# Altium PCB V1.PcbDoc
Units mil, origin at the board's own origin, x right, y up, seen from the top; angles counter-clockwise.
Board outline 2420 x 2113 mil, 2 copper layers (Top Layer, Bottom Layer); 39 components, 0 nets, 143 pads, 0 vias.
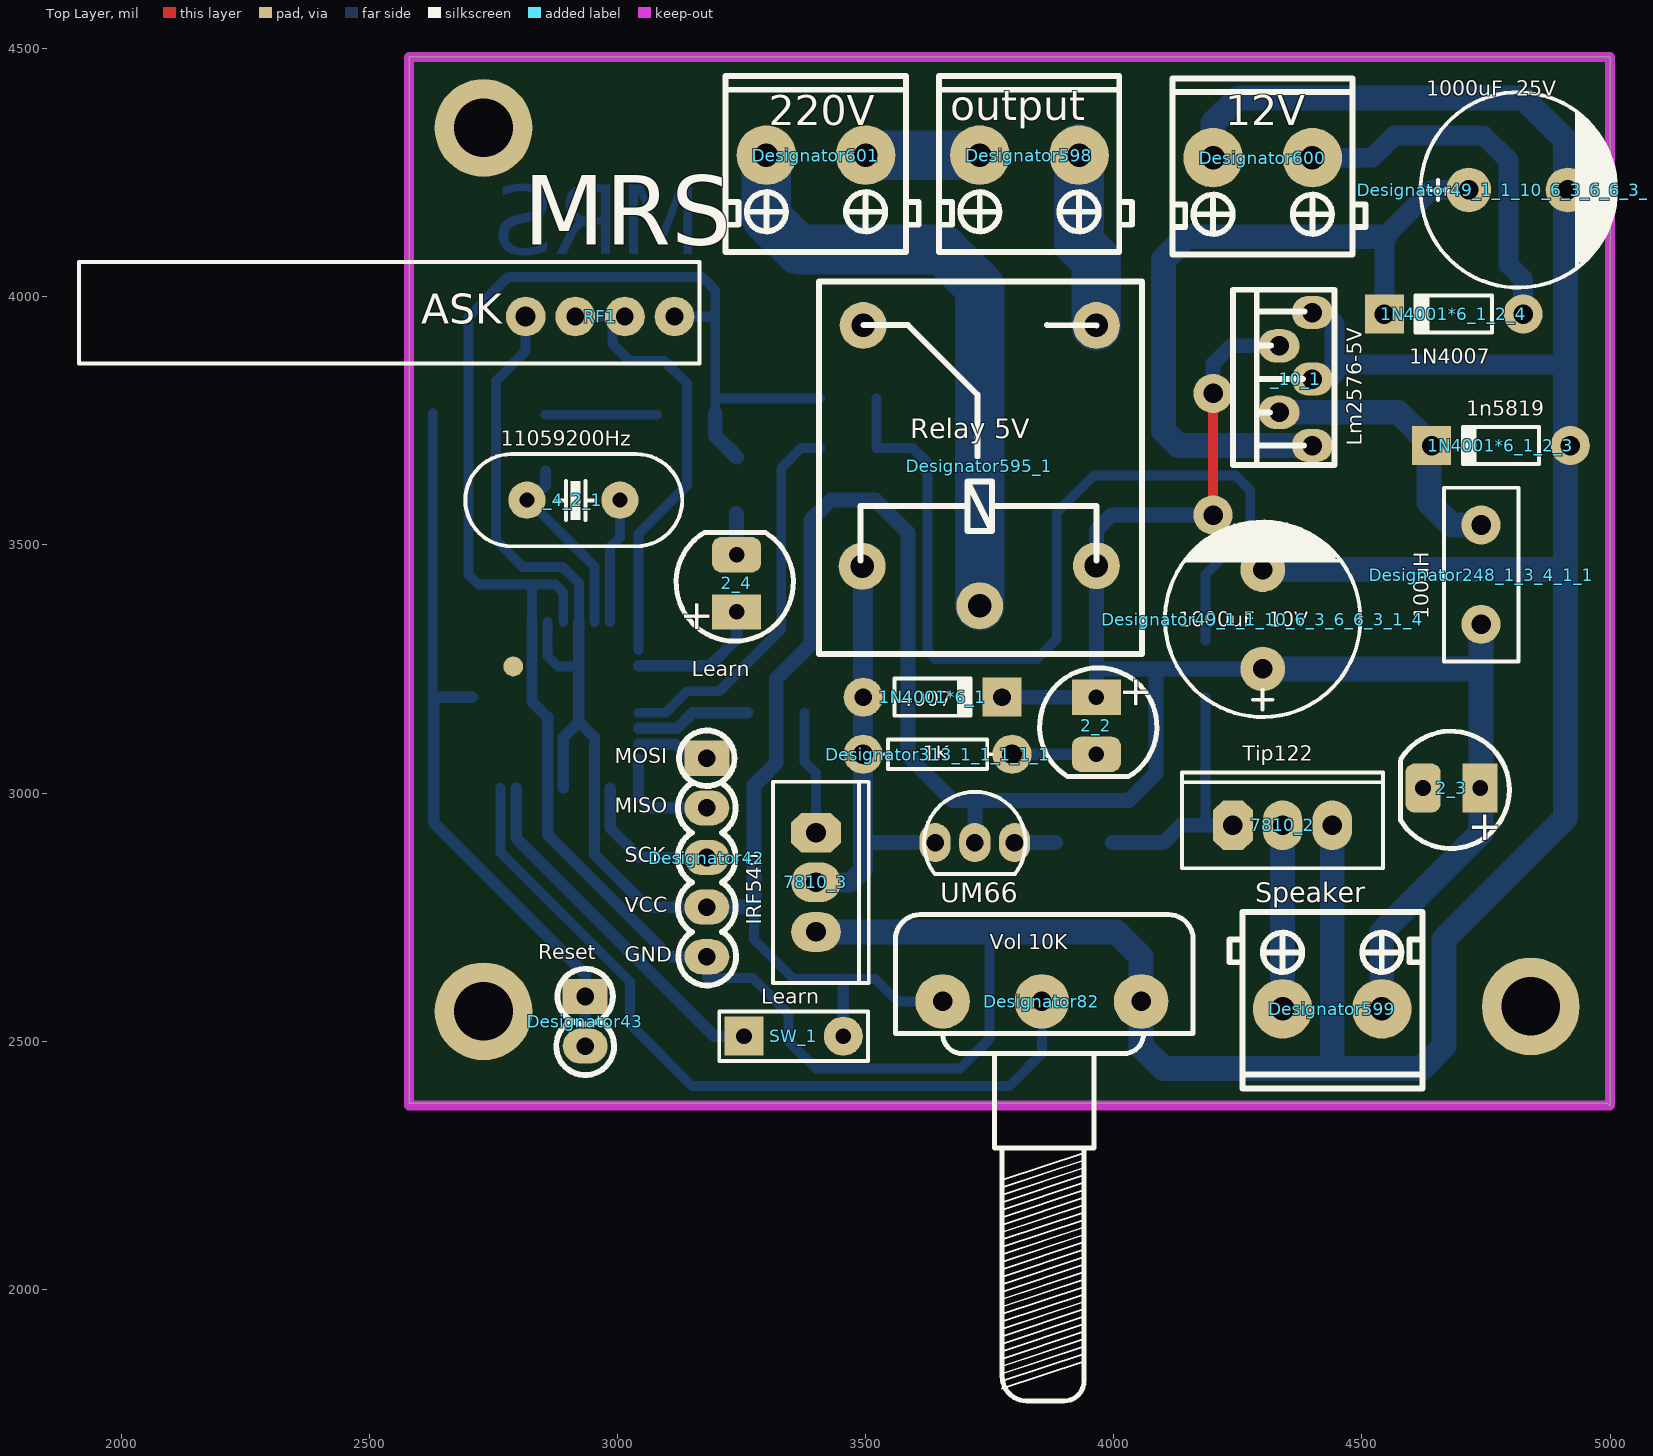
[diagram p0: Top Layer view]
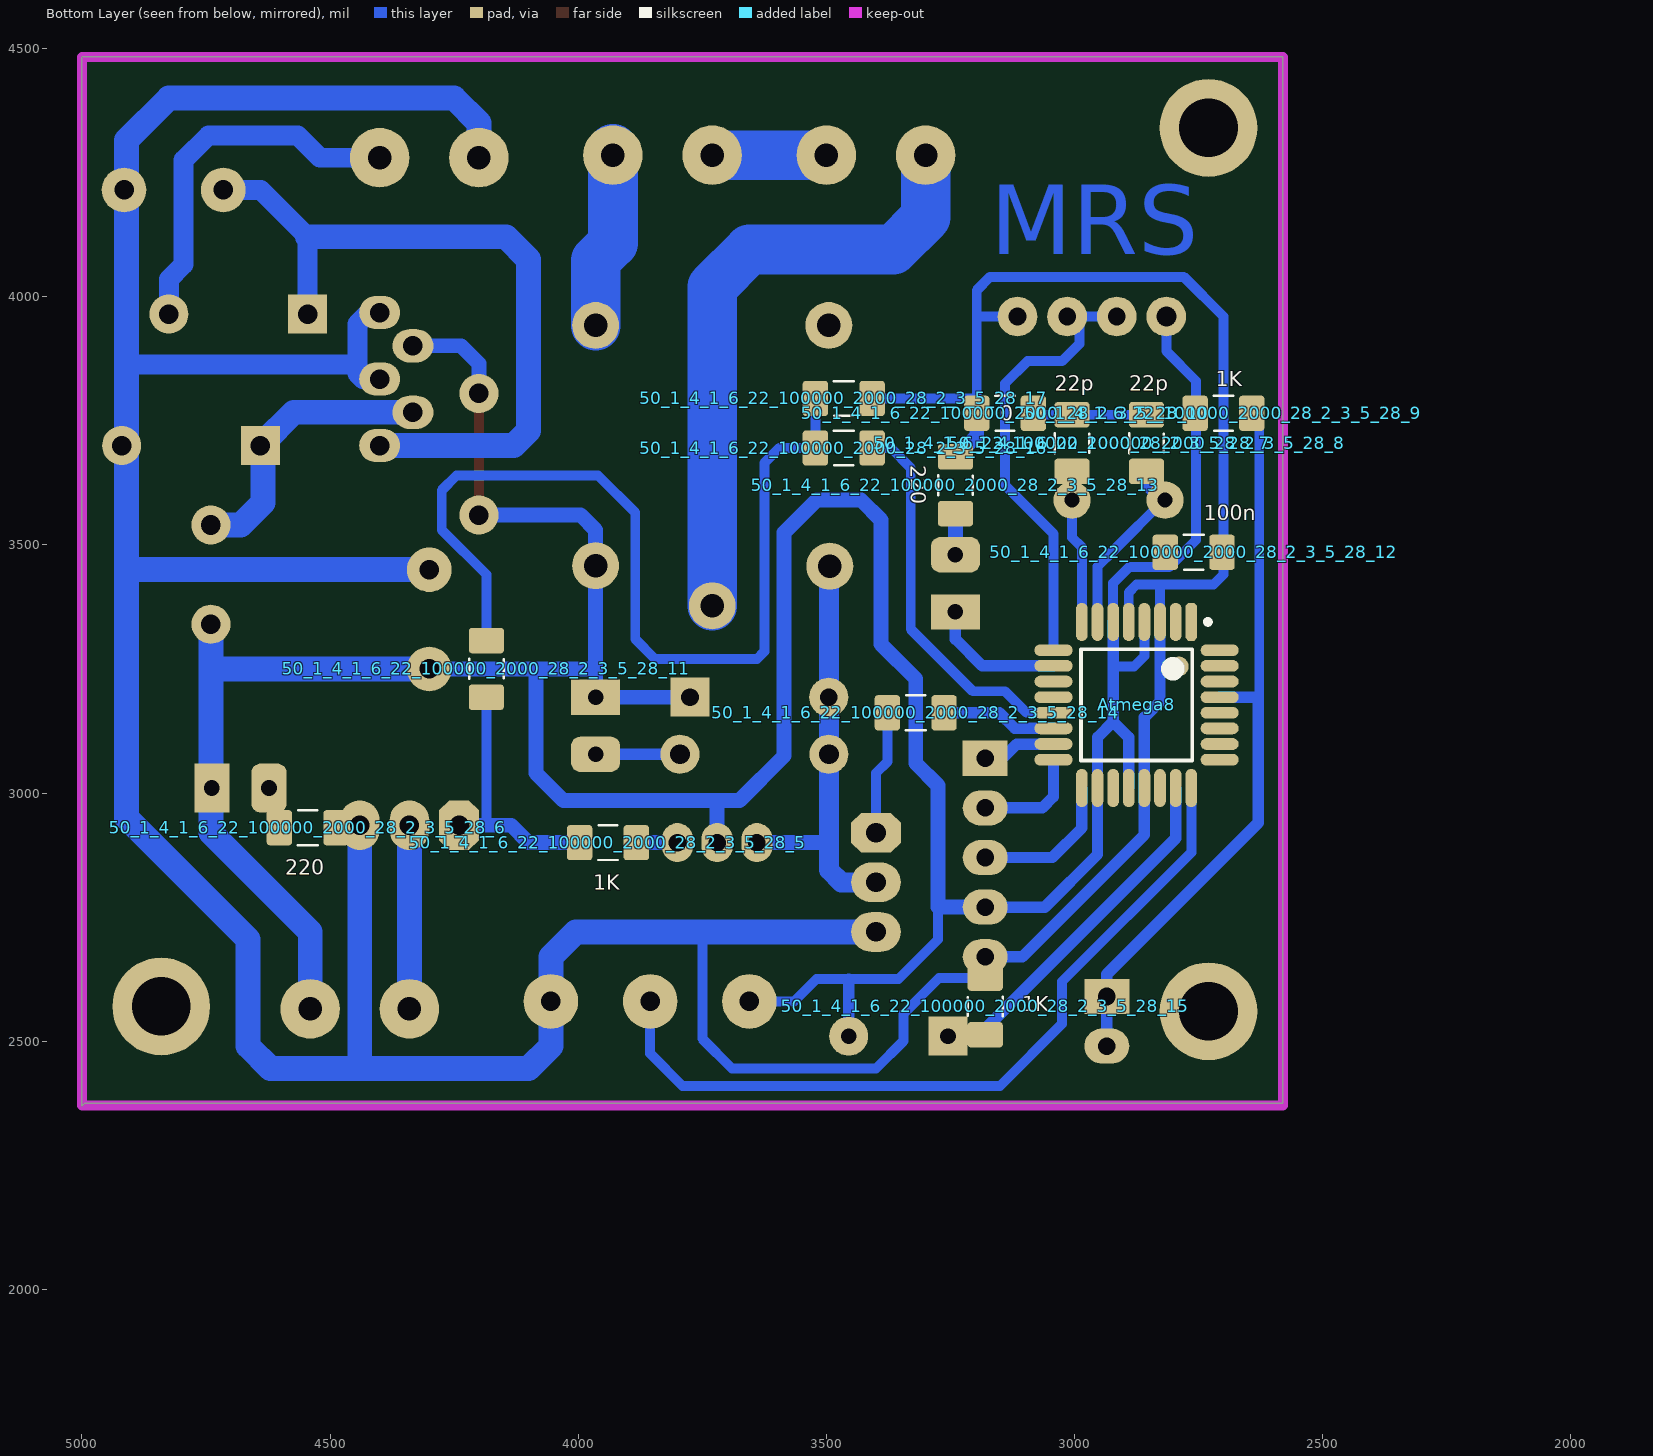
[diagram p1: Bottom Layer view, seen from below]

## Layer stack, top to bottom
Top Layer: signal copper 1.4
Dielectric: dielectric 12.6, FR-4, Dk 4.8
Bottom Layer: signal copper 1.4

## Board outline
2580,4483 5000,4483 5000,2370 4995,2375 2580,2375

## Design rules (kind name [scope] priority, off if disabled: settings)
Clearance [All] p1: gap=10
ComponentClearance [All] p1: gap=10 collisioncheckmode=3 verticalgap=10
PolygonConnect [All] p1: connectstyle=Relief reliefconductorwidth=10 reliefentries=4 polygonreliefangle="90 Angle"
RoutingVias [All] p1: holewidth=28 width=50 viastyle="Through Hole" minholewidth=28 minwidth=50 maxholewidth=28 maxwidth=50
SolderMaskExpansion [All] p1: expansion=4
TestPointUsage [All] p1: valid=0 allowmultiple=FALSE
Testpoint [All] p1: side=15 testpointundercomponent=TRUE minsize=40 maxsize=100 preferedsize=60 minholesize=0 maxholesize=40 preferedholesize=32 testpointgrid=1 style=1023 order=0-112345678
Width [All] p1: maxlimit=10 minlimit=10 preferedwidth=10
18 further rules are at their usual default settings.

## Components (designator, comment, footprint, x,y, rotation, side; value= is the part's Value field where it differs from the comment)
1N4001*6_1 "Comment" DIO7.1-3.9x1.9#1 3635,3193 r0 top
1N4001*6_1_2_3 "Comment" DIO7.1-3.9x1.9#2 4780,3700 r180 top
1N4001*6_1_2_4 "Comment" DIO7.1-3.9x1.9#2 4685,3965 r180 top
2_2 "Comment" LED-1 3965,3138 r0 top
2_3 "Comment" LED-1 4683,3010 r270 top
2_4 "Comment" LED-1 3240,3420 r180 top
50_1_4_1_6_22_100000_2000_28_2_3_5_28_5 "Comment" RESC3216X70N 3940,2900 r180 bottom
50_1_4_1_6_22_100000_2000_28_2_3_5_28_6 "Comment" RESC3216X70N 4545,2930 r180 bottom
50_1_4_1_6_22_100000_2000_28_2_3_5_28_7 "Comment" RESC3216X70N 3005,3705 r270 bottom
50_1_4_1_6_22_100000_2000_28_2_3_5_28_8 "Comment" RESC3216X70N 2855,3705 r270 bottom
50_1_4_1_6_22_100000_2000_28_2_3_5_28_9 "Comment" RESC3216X70N 2700,3765 r0 bottom
50_1_4_1_6_22_100000_2000_28_2_3_5_28_10 "Comment" RESC3216X70N 3140,3765 r0 bottom
50_1_4_1_6_22_100000_2000_28_2_3_5_28_11 "Comment" RESC3216X70N 4185,3250 r270 bottom
50_1_4_1_6_22_100000_2000_28_2_3_5_28_12 "Comment" RESC3216X70N 2760,3485 r0 bottom
50_1_4_1_6_22_100000_2000_28_2_3_5_28_13 "Comment" RESC3216X70N 3240,3620 r270 bottom
50_1_4_1_6_22_100000_2000_28_2_3_5_28_14 "Comment" RESC3216X70N 3320,3161.63 r180 bottom
50_1_4_1_6_22_100000_2000_28_2_3_5_28_15 "Comment" RESC3216X70N 3180,2570 r90 bottom
50_1_4_1_6_22_100000_2000_28_2_3_5_28_16 "Comment" RESC3216X70N 3465,3695 r0 bottom
50_1_4_1_6_22_100000_2000_28_2_3_5_28_17 "Comment" RESC3216X70N 3465,3795 r0 bottom
7810_2 "Comment" 221A-04#1 4340,2935 r0 top
7810_3 "Comment" 221A-04#2 3400,2820 r270 top
_4_2_1 "Comment" XTAL 3005,3590 r180 top
_10_1 "Comment" "CASE 314B–05" 4400,3700 r90 top
Atmega8 "Comment" My_32A_M 2875,3177.38 r270 bottom
Designator42 "Comment" SIP5 3180,3070 r270 top
Designator43 "Comment" SIP2 2935,2590 r270 top
Designator49_1_1_10_6_3_6_6_3_1_2 "Comment" "cap 04" 4815,4215 r180 top
Designator49_1_1_10_6_3_6_6_3_1_4 "Comment" "cap 04" 4300,3350 r270 top
Designator82 "Comment" VOLOM 3865,2580 r180 top
Designator248_1_3_4_1_1 "" RAD-0.2 4740,3440 r90 top
Designator313_1_1_1_1_1 "Comment" AXIAL-0.3 3645,3078 r0 top
Designator595_1 "Comment" RELAY3 3965,3458 r180 top
Designator598 "Comment" TER2 3930,4285 r0 top
Designator599 "Comment" TER2 4340,2565 r180 top
Designator600 "Comment" TER2 4400,4280 r0 top
Designator601 "Comment" TER2 3500,4285 r0 top
RF1 "Comment" HDR1X4 2815,3960 r0 top
SW_1 "Comment" HDR1X3 3255,2510 r0 top
UM66 "Comment" 78LXX 3720,2900 r180 top

## Footprints (in the part's own frame and the unit in brackets; to place one, negate y for a bottom-side part, rotate by r counter-clockwise, add the part's x,y. Pads: shape width x height; smd on the part's side, far side on the other; paste and mask are expansions set on the pad)
78LXX [mm]
  oval 1.6x2 hole 0.9: GND(2.032,0) Out(-2.032,0) VCC(0,0)
  silkscreen extent -2.6,-2.6 2.6,1.6, body extent -2.48,-2.3 2.32,1.63, height 8
221A-04#1 [mil]
  oval 80x100 hole 39.37: B(100,0) C(0,0)
  oct 80x100 hole 39.37: E(-100,0)
  silkscreen extent -203,-87 203,106
221A-04#2 [mil]
  oval 80x100 hole 39.37: D(0,0) S(100,0)
  oct 80x100 hole 39.37: G(-100,0)
  silkscreen extent -203,-87 203,106
AXIAL-0.3 [mm]
  round 2 hole 1.016: 1(-3.81,0) 2(3.81,0)
  silkscreen extent -2.77,-0.76 2.77,0.76
"cap 04" [mil]
  round 90 hole 39.37: 1(100,0) 2(-100,0)
  silkscreen extent -197,-197 197,197, body extent -198,-197 198,199, height 513
"CASE 314B–05" [mm]
  oval 1.7x2.1 hole 1: 1(0,0) 2(1.702,1.702) 3(3.404,0) 4(5.105,1.702) 5(6.807,0)
  silkscreen extent -0.99,-1.14 7.98,4.06
DIO7.1-3.9x1.9#1 [mm]
  round 2 hole 0.9: 1(-3.55,0)
  rect 2x2 hole 0.9: 2(3.55,0)
  silkscreen extent -1.95,-0.95 2.05,0.95
DIO7.1-3.9x1.9#2 [mm]
  round 2 hole 1: 1(-3.55,0)
  rect 2x2 hole 1: 2(3.55,0)
  silkscreen extent -1.95,-0.95 2.05,0.95
HDR1X3 [mm]
  round 0 all layers, no hole: 2(2.54,0)
  round 2 hole 0.8: +(5.08,0)
  rect 2x2 hole 0.8: -(0,0)
  silkscreen extent -1.27,-1.27 6.35,1.27
HDR1X4 [mil] "Connector; Header; 4 Position"
  round 80 hole 35.43: 2(100,0) -(300,0) ""(200,0)
  round 80 hole 40: +(0,0)
  silkscreen extent -900,-95 350,110
LED-1 [mm] "LED; 2 Leads"
  rect 2.5x1.8 hole 0.8: 1(0,1.397)
  rrect50% 2.5x1.8 hole 0.8: 2(0,-1.524)
  silkscreen extent -2.91,-2.67 3.09,2.9
My_32A_M [mm]
  oct 1.95x0.6 smd: 1(-4.25,2.8)
  oval 0.6x1.95 smd: 10(-2,-4.25) 13(0.4,-4.25) 14(1.2,-4.25) 25(2.8,4.25) 26(2,4.25) 27(1.2,4.25) 32(-2.8,4.25) B0(-0.4,-4.25) C5(0.4,4.25) D5(-2.8,-4.25) D7(-1.2,-4.25) MISO(2.8,-4.25) MOSI(2,-4.25) RESET(-0.4,4.25) RX(-1.2,4.25) TX(-2,4.25)
  oval 1.95x0.6 smd: 19(4.25,-1.2) 22(4.25,1.2) 24(4.25,2.8) AREF(4.25,-0.4) AVCC(4.25,-2) B5/SCK(4.25,-2.8) C0(4.25,2) D4(-4.25,2) GND(-4.25,-0.4) GND(-4.25,1.2) GND(4.25,0.4) VCC(-4.25,-1.2) VCC(-4.25,0.4) XTAL(-4.25,-2.8) XTAL(-4.25,-2)
  silkscreen extent -4.37,-2.85 2.85,3.77, body extent -3.5,-3.5 3.5,3.5, height 1.2
RAD-0.2 [mm]
  round 2 hole 1: 1(-2.54,0) 2(2.54,0)
  silkscreen extent -4.44,-1.91 4.44,1.91
RELAY3 [mm]
  round 2.4 hole 1.2: 1(0,0) 2(11.989,0.025) 3(5.969,2.057) 4(11.938,-12.294) 5(0,-12.294)
  silkscreen extent -2.34,-14.55 14.2,4.52
RESC3216X70N [mm] "Chip Resistor, Body 3.2x1.6mm, EIA 1206, IPC Medium Density"
  round 0.508 on Mech15: 0(0,0)
  rrect25% 1.3x1.8 smd: 1(-1.45,0) 2(1.45,0)
  silkscreen extent -0.51,-0.89 0.51,0.89, body extent -1.62,-0.82 1.63,0.83, height 0.69
SIP2 [mm]
  rect 1.8x2.3 hole 0.9: 1(0,0)
  oval 1.8x2.3 hole 0.9: 2(2.54,0)
  silkscreen extent -1.42,-1.48 4.02,1.48
SIP5 [mm]
  rect 1.8x2.3 hole 0.9: 1(0,0)
  oval 1.8x2.3 hole 0.9: 2(2.54,0) 3(5.08,0) 4(7.62,0) 5(10.16,0)
  silkscreen extent -1.42,-1.48 11.62,1.5
TER2 [mil]
  round 120 hole 47.24: 1(0,0) 2(-200,0)
  silkscreen extent -282,-195 107,160
VOLOM [mil]
  round 110 hole 39.37: 0(-190,0) 1(10,0) 2(210,0)
  silkscreen extent -295,-175 305,805
XTAL [mil]
  round 75 hole 30: 1(0,0) 2(187.4,0)
  silkscreen extent -126,-93 311,93, body extent -131,-94 316,95, height 514

## Part data
7810_2 7810_3: library part MC7805BT
RF1: library part COAX-M
SW_1: library part "Header 3"

## Free pads (board coordinates)
  round 196.85 hole 118.11: 0(2730,2560) 0(2730,4340) 0(4840,2570)
  round 40 all layers, no hole: 0(2790,3255)
  round 78.74 hole 39.37: 2(4200,3560) 3(4200,3805)

## Nets (pads, with @x,y where several pads share a name; then routed paths per layer and width w, separated by ;. In a path a pad name is that pad's centre, name@x,y a point inside that pad or via, vN(x,y) a via of type N, cw(c..) or ccw(c..) an arc to the next point about the centre after c; other vN are vias at no path point)
pads on no net: 1N4001*6_1.1 1N4001*6_1.2 1N4001*6_1_2_3.1 1N4001*6_1_2_3.2 1N4001*6_1_2_4.1 1N4001*6_1_2_4.2 2_2.1 2_2.2 2_3.1 2_3.2 2_4.1 2_4.2 50_1_4_1_6_22_100000_2000_28_2_3_5_28_5.0 50_1_4_1_6_22_100000_2000_28_2_3_5_28_5.1 50_1_4_1_6_22_100000_2000_28_2_3_5_28_5.2 50_1_4_1_6_22_100000_2000_28_2_3_5_28_6.0 50_1_4_1_6_22_100000_2000_28_2_3_5_28_6.1 50_1_4_1_6_22_100000_2000_28_2_3_5_28_6.2 50_1_4_1_6_22_100000_2000_28_2_3_5_28_7.0 50_1_4_1_6_22_100000_2000_28_2_3_5_28_7.1 50_1_4_1_6_22_100000_2000_28_2_3_5_28_7.2 50_1_4_1_6_22_100000_2000_28_2_3_5_28_8.0 50_1_4_1_6_22_100000_2000_28_2_3_5_28_8.1 50_1_4_1_6_22_100000_2000_28_2_3_5_28_8.2 50_1_4_1_6_22_100000_2000_28_2_3_5_28_9.0 50_1_4_1_6_22_100000_2000_28_2_3_5_28_9.1 50_1_4_1_6_22_100000_2000_28_2_3_5_28_9.2 50_1_4_1_6_22_100000_2000_28_2_3_5_28_10.0 50_1_4_1_6_22_100000_2000_28_2_3_5_28_10.1 50_1_4_1_6_22_100000_2000_28_2_3_5_28_10.2 50_1_4_1_6_22_100000_2000_28_2_3_5_28_11.0 50_1_4_1_6_22_100000_2000_28_2_3_5_28_11.1 50_1_4_1_6_22_100000_2000_28_2_3_5_28_11.2 50_1_4_1_6_22_100000_2000_28_2_3_5_28_12.0 50_1_4_1_6_22_100000_2000_28_2_3_5_28_12.1 50_1_4_1_6_22_100000_2000_28_2_3_5_28_12.2 50_1_4_1_6_22_100000_2000_28_2_3_5_28_13.0 50_1_4_1_6_22_100000_2000_28_2_3_5_28_13.1 50_1_4_1_6_22_100000_2000_28_2_3_5_28_13.2 50_1_4_1_6_22_100000_2000_28_2_3_5_28_14.0 50_1_4_1_6_22_100000_2000_28_2_3_5_28_14.1 50_1_4_1_6_22_100000_2000_28_2_3_5_28_14.2 50_1_4_1_6_22_100000_2000_28_2_3_5_28_15.0 50_1_4_1_6_22_100000_2000_28_2_3_5_28_15.1 50_1_4_1_6_22_100000_2000_28_2_3_5_28_15.2 50_1_4_1_6_22_100000_2000_28_2_3_5_28_16.0 50_1_4_1_6_22_100000_2000_28_2_3_5_28_16.1 50_1_4_1_6_22_100000_2000_28_2_3_5_28_16.2 50_1_4_1_6_22_100000_2000_28_2_3_5_28_17.0 50_1_4_1_6_22_100000_2000_28_2_3_5_28_17.1 50_1_4_1_6_22_100000_2000_28_2_3_5_28_17.2 7810_2.B 7810_2.C 7810_2.E 7810_3.D 7810_3.G 7810_3.S _4_2_1.1 _4_2_1.2 _10_1.1 _10_1.2 _10_1.3 _10_1.4 _10_1.5 Atmega8.1 Atmega8.10 Atmega8.13 Atmega8.14 Atmega8.19 Atmega8.22 Atmega8.24 Atmega8.25 Atmega8.26 Atmega8.27 Atmega8.32 Atmega8.AREF Atmega8.AVCC Atmega8.B0 Atmega8.B5/SCK Atmega8.C0 Atmega8.C5 Atmega8.D4 Atmega8.D5 Atmega8.D7 Atmega8.GND Atmega8.MISO Atmega8.MOSI Atmega8.RESET Atmega8.RX Atmega8.TX Atmega8.VCC Atmega8.XTAL Designator42.1 Designator42.2 Designator42.3 Designator42.4 Designator42.5 Designator43.1 Designator43.2 Designator49_1_1_10_6_3_6_6_3_1_2.1 Designator49_1_1_10_6_3_6_6_3_1_2.2 Designator49_1_1_10_6_3_6_6_3_1_4.1 Designator49_1_1_10_6_3_6_6_3_1_4.2 Designator82.0 Designator82.1 Designator82.2 Designator248_1_3_4_1_1.1 Designator248_1_3_4_1_1.2 Designator313_1_1_1_1_1.1 Designator313_1_1_1_1_1.2 Designator595_1.1 Designator595_1.2 Designator595_1.3 Designator595_1.4 Designator595_1.5 Designator598.1 Designator598.2 Designator599.1 Designator599.2 Designator600.1 Designator600.2 Designator601.1 Designator601.2 RF1. RF1.2 RF1.+ RF1.- SW_1.2 SW_1.+ SW_1.- UM66.GND UM66.Out UM66.VCC
copper on no net: | length 34364.7
  Top Layer w20: 4200,3560 4200,3805
  Bottom Layer w20: 2627.91,3175 2627.91,3765 ; 2764.76,3010.05 2764.76,2880.24 3025,2620 3025,2535 3150,2410 3790,2410 3855,2475 3855,2580 ; 2815,3960 2815,3890 2755,3830 2755,3510 2810,3455 2890,3455 2922.24,3422.76 2922.24,3344.7 ; 2817.6,3590 2820,3590 2920,3490 2953.74,3456.26 2953.74,3344.7 ; 2827.76,3344.7 2827.76,3420 ; 2855,3762.09 3005,3762.09 3080,3762.09 ; 2859.25,3344.7 2859.25,3275.75 2880,3255 2922.24,3255 ; 2890.75,3344.7 2890.75,3404.25 2875,3420 2828.05,3420 2720,3420 2700,3440 2700,3960 2780,4040 3170,4040 3197.09,4012.91 3197.09,3765 ; 2940,3960 3035,3960 ; 2985.24,3344.7 2985.24,3495.24 3005,3515 3005,3590 ; 2990,3960 2990,3905 3025,3870 3095,3870 3140,3825 3140,3620 3042.32,3522.32 3042.32,3287.61 ; 3042.32,3161.63 3096.63,3161.63 3140,3205 3205,3205 3330,3330 3330,3655 3370,3695 3407.91,3695 ; 3140,3960 3197.09,3960 ; 3180,2627.09 3272.91,2627.09 3345,2555 3345,2500 3400,2445 3690,2445 3750,2505 3750,2720 ; 3180,2770 3240,2770 3275,2770 3275,2705 3355,2625 3520,2625 3565,2580 3655,2580 ; 3202.09,3795 3407.91,3795 ; 3377.09,3161.63 3377.09,3062.91 3400,3040 3400,2920 ; 3522.09,3795 3522.09,3695 3595,3695 3625,3665 3625,3285 3640,3270 3845,3270 3885,3310 3885,3565 3960,3640 4245,3640 4275,3610 4275,3530 4185,3440 4185,3307.09 ; 4185,2935 4185,3192.91
  Bottom Layer w23: 2707.68,3193.12 2630,3193.12 2630,3175 2630,2940 2935,2635 2935,2490 ; 2796.26,3010.05 2796.26,2908.74 3195,2510 3265,2510 ; 2825,3590 2855,3620 2855,3647.91 ; 2827.76,3344.7 2827.76,3183.83 2859.25,3152.33 2859.25,3010.05 2859.25,2915.75 3105,2670 3180,2670 ; 2890.75,3010.05 2890.75,3111.96 2922.24,3143.45 ; 2922.24,3344.7 2922.24,3143.45 ; 2985.24,3010.05 2985.24,2929.76 3045,2870 3180,2870 ; 3042.32,3067.14 3042.32,2992.68 3065,2970 3180,2970 ; 3042.32,3098.64 3116.36,3098.64 3145,3070 3180,3070 ; 3042.32,3130.13 3120.13,3130.13 3151.63,3161.63 3262.91,3161.63 ; 3042.32,3256.12 3186.12,3256.12 3240,3310 3240,3365 ; 3180,2770 3060,2770 2953.74,2876.26 2953.74,3010.05 2953.74,3111.96 2922.24,3143.45 ; 3455,2510 3455,2625 ; 3790,3078 3965,3078
  Bottom Layer w30: 3180,2770 3275,2770 3275,3015 3320,3060 3320,3230 3390,3300 3390,3550 3430,3590 3520,3590 3585,3525 3585,3075 3675,2985 3745,2985 ; 3197.09,3765 3197.09,3720 3240,3677.09 ; 3240,3480 3240,3562.91 ; 3495,2900 3640,2900 ; 3720,2900 3720,2985 3745,2985 ; 3774.76,3193 3965,3193 3965,3458 ; 3800,2900 3882.91,2900 ; 3997.09,2900 4100,2900 4135,2935 4240,2935 ; 4085,3250 4085,3040 4030,2985 3745,2985 ; 4200,3560 3995,3560 3965,3530 3965,3255 3970,3250 4200,3250 4300,3250 ; 4200,3805 4200,3865 4236,3901 4333,3901
  Bottom Layer w40: 3400,2820 3470,2820 3495,2845 3495,2900 3495,3078 3495,3455 ; 4400,3834 4434,3834 4445,3845 4445,3945 4422,3968 4400,3968 ; 4400,4280 4520,4280 4565,4325 4745,4325 4795,4275 4795,4065 4824.76,4035.24 4824.76,3965 ; 4445,3863 4908,3863 ; 4545.24,3965 4545.24,4120.63 4639.61,4215 4715,4215
  Bottom Layer w50: 3400,2720 4005,2720 4055,2670 4055,2490 4100,2445 4440,2445 ; 4200,4280 4200,4350 4250,4400 4825,4400 4910,4315 4910,4000 ; 4300,3250 4740,3250 ; 4300,3450 4910,3450 ; 4333,3767 4573.24,3767 4635.24,3705 4635.24,3584.76 4680,3540 4740,3540 ; 4340,2565 4340,2935 ; 4400,3700 4130,3700 4100,3730 4100,4075 4145.63,4120.63 4360,4120.63 4545.24,4120.63 ; 4440,2935 4440,2445 ; 4540,2565 4540,2720 4740,2920 4740,3340 ; 4910,4010 4910,2950 4665,2705 4665,2490 4620,2445 4440,2445
  Bottom Layer w100: 3300,4285 3300,4160 3365,4095 3655,4095 3730,4020 3730,3377 ; 3500,4285 3730,4285 ; 3930,4298 3930,4108 3965,4073 3965,3942

## Keep-outs
Keep-Out Layer:
  lines w20: 2580,2370 2580,4483 5000,4483 5000,2370 2580,2370

## Other copper
Bottom Layer:
  text "emiter transistor speaker ba moghavemate 220 be drain mosfet" at 1030,4815 h140
  text "MRS" at 3170,4085 h140

## Silkscreen, mask and mechanical layers (free items; w line width, h text height)
Top Overlay:
  text "1000uF  25V" at 4630,4405 h30
  text "output" at 3670,4355 h60
  text "220V" at 3305,4345 h60
  text "12V" at 4225,4345 h60
  text "MRS" at 2810,4105 h140
  text "ASK" at 2605,3945 h60
  text "1N4007" at 4595,3865 h30
  text "1n5819" at 4710,3760 h30
  text "Relay 5V" at 3590,3715 h40
  text "11059200Hz" at 2765,3700 h30
  text "Lm2576-5V" at 4500,3700 h30 r90
  text "100uH" at 4635,3350 h30 r90
  text "1000uF  10V" at 4130,3335 h30
  text "Learn" at 3150,3235 h30
  text "4007" at 3570,3175 h30
  text "1K" at 3615,3065 h30
  text "Tip122" at 4260,3065 h30
  text "MOSI" at 2995,3060 h30
  text "MISO" at 2995,2960 h30
  text "SCK" at 3015,2860 h30
  text "Speaker" at 4285,2780 h40
  text "VCC" at 3015,2760 h30
  text "IRF540" at 3290,2735 h30 r90
  text "Vol 10K" at 3750,2685 h30
  text "Reset" at 2840,2665 h30
  text "GND" at 3015,2660 h30
  text "Learn" at 3290,2575 h30
Bottom Overlay:
  text "1K" at 2715,3820 h30
  text "22p" at 2890,3810 h30
  text "22p" at 3040,3810 h30
  text "0" at 3150,3750 h30
  text "220" at 3330,3660 h30 r90
  text "100n" at 2740,3550 h30
  text "220" at 4590,2835 h30
  text "1K" at 3970,2805 h30
  text "1K" at 3105,2560 h30

## Text inside footprints (layer, text, board x,y; h text height)
2_2: Top Overlay "+" at 4070,3168 h60 r90
2_3: Top Overlay "+" at 4713,2905 h60
2_4: Top Overlay "+" at 3135,3390 h60 r270